# EAGLE board board_inga_50mil (EAGLE 7.2.0), part 1 of 2
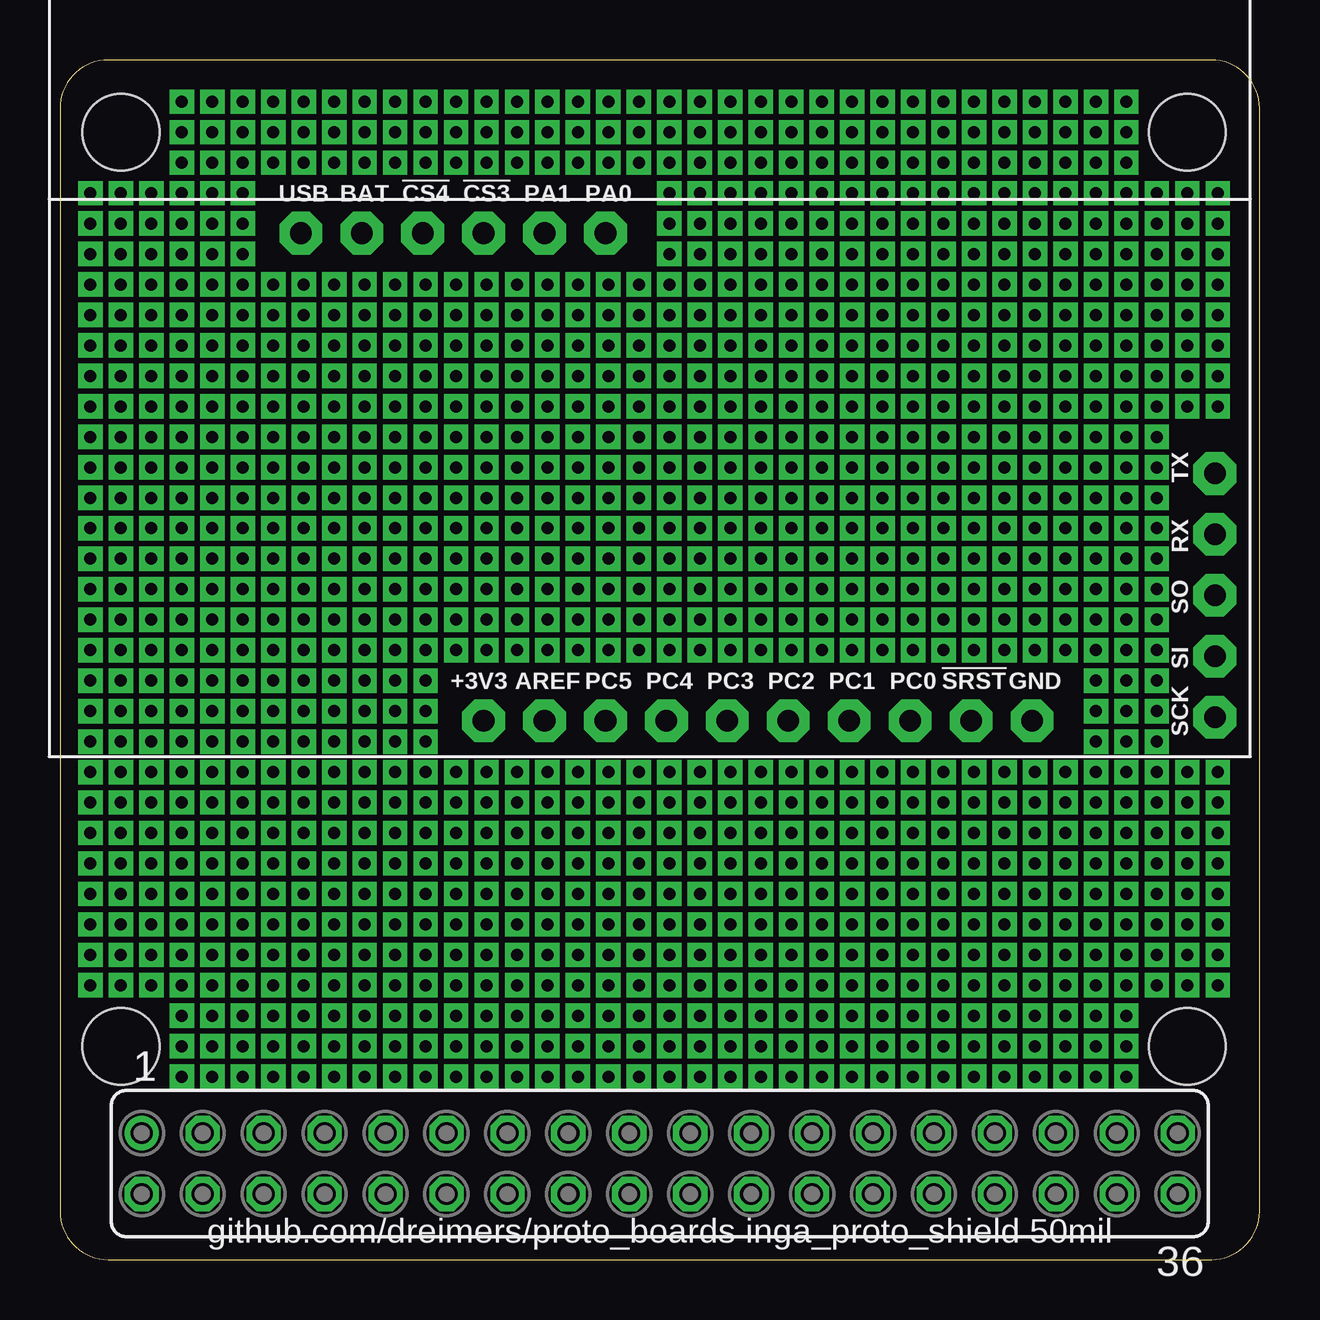
[diagram p0: board, top side]

Size 50 x 50 mm. Coordinates in mm from the lower left corner, seen from the top.
Outline: 0,48 0,2 arc90 2,0 48,0 arc90 50,2 50,48 arc90 48,50 2,50 arc90 0,48
Copper layers (1*16): Top 0.035mm / dielectric 1.5mm / Bottom 0.035mm
Design rules "ITEADstudio_DRC": minimum track width 6mil, minimum drill 12mil, track to track 6mil, track to pad 6mil, pad to pad 6mil, via to via 6mil, smd to smd 0mil, copper to edge 10mil, drill to drill 10mil, minimum pad ring 10mil, minimum via ring 6mil, stop-mask expansion 2mil, vias tented up to drill 100mil, thermal gap 10mil
Holes 3.2 mm at 2.54,8.89 46.99,8.89 2.54,46.99 46.99,46.99

## Footprints (pad centres in the part's own frame; a part is rotated, then mirrored left to right if it is on the bottom)
FE18-2 = drill 0.914: 1 -21.59,1.27 | drill 0.914 octagon: 2 -21.59,-1.27; 3 -19.05,1.27; 4 -19.05,-1.27; 5 -16.51,1.27; 6 -16.51,-1.27; 7 -13.97,1.27; 8 -13.97,-1.27; 9 -11.43,1.27; 10 -11.43,-1.27; 11 -8.89,1.27; 12 -8.89,-1.27; 13 -6.35,1.27; 14 -6.35,-1.27; 15 -3.81,1.27; 16 -3.81,-1.27; 17 -1.27,1.27; 18 -1.27,-1.27; 19 1.27,1.27; 20 1.27,-1.27; 21 3.81,1.27; 22 3.81,-1.27; 23 6.35,1.27; 24 6.35,-1.27; 25 8.89,1.27; 26 8.89,-1.27; 27 11.43,1.27; 28 11.43,-1.27; 29 13.97,1.27; 30 13.97,-1.27; 31 16.51,1.27; 32 16.51,-1.27; 33 19.05,1.27; 34 19.05,-1.27; 35 21.59,1.27; 36 21.59,-1.27
INGA1.6_NODRILLS = drill 0.9 pad 1.778 octagon: JP1_1 10.523,21.79; JP1_2 13.063,21.79; JP1_3 15.603,21.79; JP1_4 18.143,21.79; JP1_5 20.683,21.79; JP1_6 23.223,21.79; JP2_1 48.623,1.61; JP2_2 48.623,4.15; JP2_3 48.623,6.69; JP2_4 48.623,9.23; JP2_5 48.623,11.77; JP3_1 18.143,1.47; JP3_2 20.683,1.47; JP3_3 23.223,1.47; JP3_4 25.763,1.47; JP3_5 28.303,1.47; JP3_6 30.843,1.47; JP3_7 33.383,1.47; JP3_8 35.923,1.47; JP3_9 38.463,1.47; JP3_10 41.003,1.47

## Placement (x,y rotation side)
E$1  [FE18-2]  25,4 0 top
E$2  [INGA1.6_NODRILLS]  -0.48,20.99 0 top

## Library data of the parts
E$1 = con-lsta
E$2 = INGA 1.6

## Tracks (layer width: path | path; a pad name or v marks a point on that pad's centre or on a via)
S$1  (via drill 0.5 pad 1.02)
  other vias: 2.54,12.7
S$2  (via drill 0.5 pad 1.02)
  other vias: 3.81,12.7
S$3  (via drill 0.5 pad 1.02)
  other vias: 5.08,12.7
S$4  (via drill 0.5 pad 1.02)
  other vias: 6.35,12.7
S$5  (via drill 0.5 pad 1.02)
  other vias: 7.62,12.7
S$6  (via drill 0.5 pad 1.02)
  other vias: 8.89,12.7
S$7  (via drill 0.5 pad 1.02)
  other vias: 10.16,12.7
S$8  (via drill 0.5 pad 1.02)
  other vias: 11.43,12.7
S$9  (via drill 0.5 pad 1.02)
  other vias: 12.7,12.7
S$10  (via drill 0.5 pad 1.02)
  other vias: 13.97,12.7
S$11  (via drill 0.5 pad 1.02)
  other vias: 15.24,12.7
S$12  (via drill 0.5 pad 1.02)
  other vias: 16.51,12.7
S$13  (via drill 0.5 pad 1.02)
  other vias: 17.78,12.7
S$14  (via drill 0.5 pad 1.02)
  other vias: 19.05,12.7
S$15  (via drill 0.5 pad 1.02)
  other vias: 20.32,12.7
S$16  (via drill 0.5 pad 1.02)
  other vias: 21.59,12.7
S$17  (via drill 0.5 pad 1.02)
  other vias: 22.86,12.7
S$18  (via drill 0.5 pad 1.02)
  other vias: 24.13,12.7
S$19  (via drill 0.5 pad 1.02)
  other vias: 25.4,12.7
S$20  (via drill 0.5 pad 1.02)
  other vias: 26.67,12.7
S$21  (via drill 0.5 pad 1.02)
  other vias: 27.94,12.7
S$22  (via drill 0.5 pad 1.02)
  other vias: 29.21,12.7
S$23  (via drill 0.5 pad 1.02)
  other vias: 30.48,12.7
S$24  (via drill 0.5 pad 1.02)
  other vias: 31.75,12.7
S$25  (via drill 0.5 pad 1.02)
  other vias: 33.02,12.7
S$26  (via drill 0.5 pad 1.02)
  other vias: 34.29,12.7
S$27  (via drill 0.5 pad 1.02)
  other vias: 35.56,12.7
S$28  (via drill 0.5 pad 1.02)
  other vias: 36.83,12.7
S$29  (via drill 0.5 pad 1.02)
  other vias: 38.1,12.7
S$30  (via drill 0.5 pad 1.02)
  other vias: 39.37,12.7
S$31  (via drill 0.5 pad 1.02)
  other vias: 40.64,12.7
S$32  (via drill 0.5 pad 1.02)
  other vias: 41.91,12.7
S$33  (via drill 0.5 pad 1.02)
  other vias: 43.18,12.7
S$34  (via drill 0.5 pad 1.02)
  other vias: 44.45,12.7
S$35  (via drill 0.5 pad 1.02)
  other vias: 45.72,12.7
S$36  (via drill 0.5 pad 1.02)
  other vias: 46.99,12.7
S$37  (via drill 0.5 pad 1.02)
  other vias: 48.26,12.7
S$38  (via drill 0.5 pad 1.02)
  other vias: 1.27,12.7
S$39  (via drill 0.5 pad 1.02)
  other vias: 2.54,11.43
S$40  (via drill 0.5 pad 1.02)
  other vias: 3.81,11.43
S$41  (via drill 0.5 pad 1.02)
  other vias: 5.08,11.43
S$42  (via drill 0.5 pad 1.02)
  other vias: 6.35,11.43
S$43  (via drill 0.5 pad 1.02)
  other vias: 7.62,11.43
S$44  (via drill 0.5 pad 1.02)
  other vias: 8.89,11.43
S$45  (via drill 0.5 pad 1.02)
  other vias: 10.16,11.43
S$46  (via drill 0.5 pad 1.02)
  other vias: 11.43,11.43
S$47  (via drill 0.5 pad 1.02)
  other vias: 12.7,11.43
S$48  (via drill 0.5 pad 1.02)
  other vias: 13.97,11.43
S$49  (via drill 0.5 pad 1.02)
  other vias: 15.24,11.43
S$50  (via drill 0.5 pad 1.02)
  other vias: 16.51,11.43
S$51  (via drill 0.5 pad 1.02)
  other vias: 17.78,11.43
S$52  (via drill 0.5 pad 1.02)
  other vias: 19.05,11.43
S$53  (via drill 0.5 pad 1.02)
  other vias: 20.32,11.43
S$54  (via drill 0.5 pad 1.02)
  other vias: 21.59,11.43
S$55  (via drill 0.5 pad 1.02)
  other vias: 22.86,11.43
S$56  (via drill 0.5 pad 1.02)
  other vias: 24.13,11.43
S$57  (via drill 0.5 pad 1.02)
  other vias: 25.4,11.43
S$58  (via drill 0.5 pad 1.02)
  other vias: 26.67,11.43
S$59  (via drill 0.5 pad 1.02)
  other vias: 27.94,11.43
S$60  (via drill 0.5 pad 1.02)
  other vias: 29.21,11.43
S$61  (via drill 0.5 pad 1.02)
  other vias: 30.48,11.43
S$62  (via drill 0.5 pad 1.02)
  other vias: 31.75,11.43
S$63  (via drill 0.5 pad 1.02)
  other vias: 33.02,11.43
S$64  (via drill 0.5 pad 1.02)
  other vias: 34.29,11.43
S$65  (via drill 0.5 pad 1.02)
  other vias: 35.56,11.43
S$66  (via drill 0.5 pad 1.02)
  other vias: 36.83,11.43
S$67  (via drill 0.5 pad 1.02)
  other vias: 38.1,11.43
S$68  (via drill 0.5 pad 1.02)
  other vias: 39.37,11.43
S$69  (via drill 0.5 pad 1.02)
  other vias: 40.64,11.43
S$70  (via drill 0.5 pad 1.02)
  other vias: 41.91,11.43
S$71  (via drill 0.5 pad 1.02)
  other vias: 43.18,11.43
S$72  (via drill 0.5 pad 1.02)
  other vias: 44.45,11.43
S$73  (via drill 0.5 pad 1.02)
  other vias: 45.72,11.43
S$74  (via drill 0.5 pad 1.02)
  other vias: 46.99,11.43
S$75  (via drill 0.5 pad 1.02)
  other vias: 48.26,11.43
S$76  (via drill 0.5 pad 1.02)
  other vias: 1.27,11.43
S$77  (via drill 0.5 pad 1.02)
  other vias: 2.54,15.24
S$78  (via drill 0.5 pad 1.02)
  other vias: 3.81,15.24
S$79  (via drill 0.5 pad 1.02)
  other vias: 5.08,15.24
S$80  (via drill 0.5 pad 1.02)
  other vias: 6.35,15.24
S$81  (via drill 0.5 pad 1.02)
  other vias: 7.62,15.24
S$82  (via drill 0.5 pad 1.02)
  other vias: 8.89,15.24
S$83  (via drill 0.5 pad 1.02)
  other vias: 10.16,15.24
S$84  (via drill 0.5 pad 1.02)
  other vias: 11.43,15.24
S$85  (via drill 0.5 pad 1.02)
  other vias: 12.7,15.24
S$86  (via drill 0.5 pad 1.02)
  other vias: 13.97,15.24
S$87  (via drill 0.5 pad 1.02)
  other vias: 15.24,15.24
S$88  (via drill 0.5 pad 1.02)
  other vias: 16.51,15.24
S$89  (via drill 0.5 pad 1.02)
  other vias: 17.78,15.24
S$90  (via drill 0.5 pad 1.02)
  other vias: 19.05,15.24
S$91  (via drill 0.5 pad 1.02)
  other vias: 20.32,15.24
S$92  (via drill 0.5 pad 1.02)
  other vias: 21.59,15.24
S$93  (via drill 0.5 pad 1.02)
  other vias: 22.86,15.24
S$94  (via drill 0.5 pad 1.02)
  other vias: 24.13,15.24
S$95  (via drill 0.5 pad 1.02)
  other vias: 25.4,15.24
S$96  (via drill 0.5 pad 1.02)
  other vias: 26.67,15.24
S$97  (via drill 0.5 pad 1.02)
  other vias: 27.94,15.24
S$98  (via drill 0.5 pad 1.02)
  other vias: 29.21,15.24
S$99  (via drill 0.5 pad 1.02)
  other vias: 30.48,15.24
S$100  (via drill 0.5 pad 1.02)
  other vias: 31.75,15.24
S$101  (via drill 0.5 pad 1.02)
  other vias: 33.02,15.24
S$102  (via drill 0.5 pad 1.02)
  other vias: 34.29,15.24
S$103  (via drill 0.5 pad 1.02)
  other vias: 35.56,15.24
S$104  (via drill 0.5 pad 1.02)
  other vias: 36.83,15.24
S$105  (via drill 0.5 pad 1.02)
  other vias: 38.1,15.24
S$106  (via drill 0.5 pad 1.02)
  other vias: 39.37,15.24
S$107  (via drill 0.5 pad 1.02)
  other vias: 40.64,15.24
S$108  (via drill 0.5 pad 1.02)
  other vias: 41.91,15.24
S$109  (via drill 0.5 pad 1.02)
  other vias: 43.18,15.24
S$110  (via drill 0.5 pad 1.02)
  other vias: 44.45,15.24
S$111  (via drill 0.5 pad 1.02)
  other vias: 45.72,15.24
S$112  (via drill 0.5 pad 1.02)
  other vias: 46.99,15.24
S$113  (via drill 0.5 pad 1.02)
  other vias: 48.26,15.24
S$114  (via drill 0.5 pad 1.02)
  other vias: 1.27,15.24
S$115  (via drill 0.5 pad 1.02)
  other vias: 2.54,13.97
S$116  (via drill 0.5 pad 1.02)
  other vias: 3.81,13.97
S$117  (via drill 0.5 pad 1.02)
  other vias: 5.08,13.97
S$118  (via drill 0.5 pad 1.02)
  other vias: 6.35,13.97
S$119  (via drill 0.5 pad 1.02)
  other vias: 7.62,13.97
S$120  (via drill 0.5 pad 1.02)
  other vias: 8.89,13.97
S$121  (via drill 0.5 pad 1.02)
  other vias: 10.16,13.97
S$122  (via drill 0.5 pad 1.02)
  other vias: 11.43,13.97
S$123  (via drill 0.5 pad 1.02)
  other vias: 12.7,13.97
S$124  (via drill 0.5 pad 1.02)
  other vias: 13.97,13.97
S$125  (via drill 0.5 pad 1.02)
  other vias: 15.24,13.97
S$126  (via drill 0.5 pad 1.02)
  other vias: 16.51,13.97
S$127  (via drill 0.5 pad 1.02)
  other vias: 17.78,13.97
S$128  (via drill 0.5 pad 1.02)
  other vias: 19.05,13.97
S$129  (via drill 0.5 pad 1.02)
  other vias: 20.32,13.97
S$130  (via drill 0.5 pad 1.02)
  other vias: 21.59,13.97
S$131  (via drill 0.5 pad 1.02)
  other vias: 22.86,13.97
S$132  (via drill 0.5 pad 1.02)
  other vias: 24.13,13.97
S$133  (via drill 0.5 pad 1.02)
  other vias: 25.4,13.97
S$134  (via drill 0.5 pad 1.02)
  other vias: 26.67,13.97
S$135  (via drill 0.5 pad 1.02)
  other vias: 27.94,13.97
S$136  (via drill 0.5 pad 1.02)
  other vias: 29.21,13.97
S$137  (via drill 0.5 pad 1.02)
  other vias: 30.48,13.97
S$138  (via drill 0.5 pad 1.02)
  other vias: 31.75,13.97
S$139  (via drill 0.5 pad 1.02)
  other vias: 33.02,13.97
S$140  (via drill 0.5 pad 1.02)
  other vias: 34.29,13.97
S$141  (via drill 0.5 pad 1.02)
  other vias: 35.56,13.97
S$142  (via drill 0.5 pad 1.02)
  other vias: 36.83,13.97
S$143  (via drill 0.5 pad 1.02)
  other vias: 38.1,13.97
S$144  (via drill 0.5 pad 1.02)
  other vias: 39.37,13.97
S$145  (via drill 0.5 pad 1.02)
  other vias: 40.64,13.97
S$146  (via drill 0.5 pad 1.02)
  other vias: 41.91,13.97
S$147  (via drill 0.5 pad 1.02)
  other vias: 43.18,13.97
S$148  (via drill 0.5 pad 1.02)
  other vias: 44.45,13.97
S$149  (via drill 0.5 pad 1.02)
  other vias: 45.72,13.97
S$150  (via drill 0.5 pad 1.02)
  other vias: 46.99,13.97
S$151  (via drill 0.5 pad 1.02)
  other vias: 48.26,13.97
S$152  (via drill 0.5 pad 1.02)
  other vias: 1.27,13.97
S$153  (via drill 0.5 pad 1.02)
  other vias: 2.54,17.78
S$154  (via drill 0.5 pad 1.02)
  other vias: 3.81,17.78
S$155  (via drill 0.5 pad 1.02)
  other vias: 5.08,17.78
S$156  (via drill 0.5 pad 1.02)
  other vias: 6.35,17.78
S$157  (via drill 0.5 pad 1.02)
  other vias: 7.62,17.78
S$158  (via drill 0.5 pad 1.02)
  other vias: 8.89,17.78
S$159  (via drill 0.5 pad 1.02)
  other vias: 10.16,17.78
S$160  (via drill 0.5 pad 1.02)
  other vias: 11.43,17.78
S$161  (via drill 0.5 pad 1.02)
  other vias: 12.7,17.78
S$162  (via drill 0.5 pad 1.02)
  other vias: 13.97,17.78
S$163  (via drill 0.5 pad 1.02)
  other vias: 15.24,17.78
S$164  (via drill 0.5 pad 1.02)
  other vias: 16.51,17.78
S$165  (via drill 0.5 pad 1.02)
  other vias: 17.78,17.78
S$166  (via drill 0.5 pad 1.02)
  other vias: 19.05,17.78
S$167  (via drill 0.5 pad 1.02)
  other vias: 20.32,17.78
S$168  (via drill 0.5 pad 1.02)
  other vias: 21.59,17.78
S$169  (via drill 0.5 pad 1.02)
  other vias: 22.86,17.78
S$170  (via drill 0.5 pad 1.02)
  other vias: 24.13,17.78
S$171  (via drill 0.5 pad 1.02)
  other vias: 25.4,17.78
S$172  (via drill 0.5 pad 1.02)
  other vias: 26.67,17.78
S$173  (via drill 0.5 pad 1.02)
  other vias: 27.94,17.78
S$174  (via drill 0.5 pad 1.02)
  other vias: 29.21,17.78
S$175  (via drill 0.5 pad 1.02)
  other vias: 30.48,17.78
S$176  (via drill 0.5 pad 1.02)
  other vias: 31.75,17.78
S$177  (via drill 0.5 pad 1.02)
  other vias: 33.02,17.78
S$178  (via drill 0.5 pad 1.02)
  other vias: 34.29,17.78
S$179  (via drill 0.5 pad 1.02)
  other vias: 35.56,17.78
S$180  (via drill 0.5 pad 1.02)
  other vias: 36.83,17.78
S$181  (via drill 0.5 pad 1.02)
  other vias: 38.1,17.78
S$182  (via drill 0.5 pad 1.02)
  other vias: 39.37,17.78
S$183  (via drill 0.5 pad 1.02)
  other vias: 40.64,17.78
S$184  (via drill 0.5 pad 1.02)
  other vias: 41.91,17.78
S$185  (via drill 0.5 pad 1.02)
  other vias: 43.18,17.78
S$186  (via drill 0.5 pad 1.02)
  other vias: 44.45,17.78
S$187  (via drill 0.5 pad 1.02)
  other vias: 45.72,17.78
S$188  (via drill 0.5 pad 1.02)
  other vias: 46.99,17.78
S$189  (via drill 0.5 pad 1.02)
  other vias: 48.26,17.78
S$190  (via drill 0.5 pad 1.02)
  other vias: 1.27,17.78
S$191  (via drill 0.5 pad 1.02)
  other vias: 2.54,16.51
S$192  (via drill 0.5 pad 1.02)
  other vias: 3.81,16.51
S$193  (via drill 0.5 pad 1.02)
  other vias: 5.08,16.51
S$194  (via drill 0.5 pad 1.02)
  other vias: 6.35,16.51
S$195  (via drill 0.5 pad 1.02)
  other vias: 7.62,16.51
S$196  (via drill 0.5 pad 1.02)
  other vias: 8.89,16.51
S$197  (via drill 0.5 pad 1.02)
  other vias: 10.16,16.51
S$198  (via drill 0.5 pad 1.02)
  other vias: 11.43,16.51
S$199  (via drill 0.5 pad 1.02)
  other vias: 12.7,16.51
S$200  (via drill 0.5 pad 1.02)
  other vias: 13.97,16.51
S$201  (via drill 0.5 pad 1.02)
  other vias: 15.24,16.51
S$202  (via drill 0.5 pad 1.02)
  other vias: 16.51,16.51
S$203  (via drill 0.5 pad 1.02)
  other vias: 17.78,16.51
S$204  (via drill 0.5 pad 1.02)
  other vias: 19.05,16.51
S$205  (via drill 0.5 pad 1.02)
  other vias: 20.32,16.51
S$206  (via drill 0.5 pad 1.02)
  other vias: 21.59,16.51
S$207  (via drill 0.5 pad 1.02)
  other vias: 22.86,16.51
S$208  (via drill 0.5 pad 1.02)
  other vias: 24.13,16.51
S$209  (via drill 0.5 pad 1.02)
  other vias: 25.4,16.51
S$210  (via drill 0.5 pad 1.02)
  other vias: 26.67,16.51
S$211  (via drill 0.5 pad 1.02)
  other vias: 27.94,16.51
S$212  (via drill 0.5 pad 1.02)
  other vias: 29.21,16.51
S$213  (via drill 0.5 pad 1.02)
  other vias: 30.48,16.51
S$214  (via drill 0.5 pad 1.02)
  other vias: 31.75,16.51
S$215  (via drill 0.5 pad 1.02)
  other vias: 33.02,16.51
S$216  (via drill 0.5 pad 1.02)
  other vias: 34.29,16.51
S$217  (via drill 0.5 pad 1.02)
  other vias: 35.56,16.51
S$218  (via drill 0.5 pad 1.02)
  other vias: 36.83,16.51
S$219  (via drill 0.5 pad 1.02)
  other vias: 38.1,16.51
S$220  (via drill 0.5 pad 1.02)
  other vias: 39.37,16.51
S$221  (via drill 0.5 pad 1.02)
  other vias: 40.64,16.51
S$222  (via drill 0.5 pad 1.02)
  other vias: 41.91,16.51
S$223  (via drill 0.5 pad 1.02)
  other vias: 43.18,16.51
S$224  (via drill 0.5 pad 1.02)
  other vias: 44.45,16.51
S$225  (via drill 0.5 pad 1.02)
  other vias: 45.72,16.51
S$226  (via drill 0.5 pad 1.02)
  other vias: 46.99,16.51
S$227  (via drill 0.5 pad 1.02)
  other vias: 48.26,16.51
S$228  (via drill 0.5 pad 1.02)
  other vias: 1.27,16.51
S$229  (via drill 0.5 pad 1.02)
  other vias: 2.54,20.32
S$230  (via drill 0.5 pad 1.02)
  other vias: 3.81,20.32
S$231  (via drill 0.5 pad 1.02)
  other vias: 5.08,20.32
S$232  (via drill 0.5 pad 1.02)
  other vias: 6.35,20.32
S$233  (via drill 0.5 pad 1.02)
  other vias: 7.62,20.32
S$234  (via drill 0.5 pad 1.02)
  other vias: 8.89,20.32
S$235  (via drill 0.5 pad 1.02)
  other vias: 10.16,20.32
S$236  (via drill 0.5 pad 1.02)
  other vias: 11.43,20.32
S$237  (via drill 0.5 pad 1.02)
  other vias: 12.7,20.32
S$238  (via drill 0.5 pad 1.02)
  other vias: 13.97,20.32
S$239  (via drill 0.5 pad 1.02)
  other vias: 15.24,20.32
S$240  (via drill 0.5 pad 1.02)
  other vias: 16.51,20.32
S$241  (via drill 0.5 pad 1.02)
  other vias: 17.78,20.32
S$242  (via drill 0.5 pad 1.02)
  other vias: 19.05,20.32
S$243  (via drill 0.5 pad 1.02)
  other vias: 20.32,20.32
S$244  (via drill 0.5 pad 1.02)
  other vias: 21.59,20.32
S$245  (via drill 0.5 pad 1.02)
  other vias: 22.86,20.32
S$246  (via drill 0.5 pad 1.02)
  other vias: 24.13,20.32
S$247  (via drill 0.5 pad 1.02)
  other vias: 25.4,20.32
S$248  (via drill 0.5 pad 1.02)
  other vias: 26.67,20.32
S$249  (via drill 0.5 pad 1.02)
  other vias: 27.94,20.32
S$250  (via drill 0.5 pad 1.02)
  other vias: 29.21,20.32
S$251  (via drill 0.5 pad 1.02)
  other vias: 30.48,20.32
S$252  (via drill 0.5 pad 1.02)
  other vias: 31.75,20.32
S$253  (via drill 0.5 pad 1.02)
  other vias: 33.02,20.32
S$254  (via drill 0.5 pad 1.02)
  other vias: 34.29,20.32
S$255  (via drill 0.5 pad 1.02)
  other vias: 35.56,20.32
S$256  (via drill 0.5 pad 1.02)
  other vias: 36.83,20.32
S$257  (via drill 0.5 pad 1.02)
  other vias: 38.1,20.32
S$258  (via drill 0.5 pad 1.02)
  other vias: 39.37,20.32
S$259  (via drill 0.5 pad 1.02)
  other vias: 40.64,20.32
S$260  (via drill 0.5 pad 1.02)
  other vias: 41.91,20.32
S$261  (via drill 0.5 pad 1.02)
  other vias: 43.18,20.32
S$262  (via drill 0.5 pad 1.02)
  other vias: 44.45,20.32
S$263  (via drill 0.5 pad 1.02)
  other vias: 45.72,20.32
S$264  (via drill 0.5 pad 1.02)
  other vias: 46.99,20.32
S$265  (via drill 0.5 pad 1.02)
  other vias: 48.26,20.32
S$266  (via drill 0.5 pad 1.02)
  other vias: 1.27,20.32
S$267  (via drill 0.5 pad 1.02)
  other vias: 2.54,19.05
S$268  (via drill 0.5 pad 1.02)
  other vias: 3.81,19.05
S$269  (via drill 0.5 pad 1.02)
  other vias: 5.08,19.05
S$270  (via drill 0.5 pad 1.02)
  other vias: 6.35,19.05
S$271  (via drill 0.5 pad 1.02)
  other vias: 7.62,19.05
S$272  (via drill 0.5 pad 1.02)
  other vias: 8.89,19.05
S$273  (via drill 0.5 pad 1.02)
  other vias: 10.16,19.05
S$274  (via drill 0.5 pad 1.02)
  other vias: 11.43,19.05
S$275  (via drill 0.5 pad 1.02)
  other vias: 12.7,19.05
S$276  (via drill 0.5 pad 1.02)
  other vias: 13.97,19.05
S$277  (via drill 0.5 pad 1.02)
  other vias: 15.24,19.05
S$278  (via drill 0.5 pad 1.02)
  other vias: 16.51,19.05
S$279  (via drill 0.5 pad 1.02)
  other vias: 17.78,19.05
S$280  (via drill 0.5 pad 1.02)
  other vias: 19.05,19.05
S$281  (via drill 0.5 pad 1.02)
  other vias: 20.32,19.05
S$282  (via drill 0.5 pad 1.02)
  other vias: 21.59,19.05
S$283  (via drill 0.5 pad 1.02)
  other vias: 22.86,19.05
S$284  (via drill 0.5 pad 1.02)
  other vias: 24.13,19.05
S$285  (via drill 0.5 pad 1.02)
  other vias: 25.4,19.05
S$286  (via drill 0.5 pad 1.02)
  other vias: 26.67,19.05
S$287  (via drill 0.5 pad 1.02)
  other vias: 27.94,19.05
S$288  (via drill 0.5 pad 1.02)
  other vias: 29.21,19.05
S$289  (via drill 0.5 pad 1.02)
  other vias: 30.48,19.05
S$290  (via drill 0.5 pad 1.02)
  other vias: 31.75,19.05
S$291  (via drill 0.5 pad 1.02)
  other vias: 33.02,19.05
S$292  (via drill 0.5 pad 1.02)
  other vias: 34.29,19.05
S$293  (via drill 0.5 pad 1.02)
  other vias: 35.56,19.05
S$294  (via drill 0.5 pad 1.02)
  other vias: 36.83,19.05
S$295  (via drill 0.5 pad 1.02)
  other vias: 38.1,19.05
S$296  (via drill 0.5 pad 1.02)
  other vias: 39.37,19.05
S$297  (via drill 0.5 pad 1.02)
  other vias: 40.64,19.05
S$298  (via drill 0.5 pad 1.02)
  other vias: 41.91,19.05
S$299  (via drill 0.5 pad 1.02)
  other vias: 43.18,19.05
S$300  (via drill 0.5 pad 1.02)
  other vias: 44.45,19.05
S$301  (via drill 0.5 pad 1.02)
  other vias: 45.72,19.05
S$302  (via drill 0.5 pad 1.02)
  other vias: 46.99,19.05
S$303  (via drill 0.5 pad 1.02)
  other vias: 48.26,19.05
S$304  (via drill 0.5 pad 1.02)
  other vias: 1.27,19.05
S$305  (via drill 0.5 pad 1.02)
  other vias: 2.54,22.86
S$306  (via drill 0.5 pad 1.02)
  other vias: 3.81,22.86
S$307  (via drill 0.5 pad 1.02)
  other vias: 5.08,22.86
S$308  (via drill 0.5 pad 1.02)
  other vias: 6.35,22.86
S$309  (via drill 0.5 pad 1.02)
  other vias: 7.62,22.86
S$310  (via drill 0.5 pad 1.02)
  other vias: 8.89,22.86
S$311  (via drill 0.5 pad 1.02)
  other vias: 10.16,22.86
S$312  (via drill 0.5 pad 1.02)
  other vias: 11.43,22.86
S$313  (via drill 0.5 pad 1.02)
  other vias: 12.7,22.86
S$314  (via drill 0.5 pad 1.02)
  other vias: 13.97,22.86
S$315  (via drill 0.5 pad 1.02)
  other vias: 15.24,22.86
S$337  (via drill 0.5 pad 1.02)
  other vias: 43.18,22.86
S$338  (via drill 0.5 pad 1.02)
  other vias: 44.45,22.86
S$339  (via drill 0.5 pad 1.02)
  other vias: 45.72,22.86
S$342  (via drill 0.5 pad 1.02)
  other vias: 1.27,22.86
S$343  (via drill 0.5 pad 1.02)
  other vias: 2.54,21.59
S$344  (via drill 0.5 pad 1.02)
  other vias: 3.81,21.59
S$345  (via drill 0.5 pad 1.02)
  other vias: 5.08,21.59
S$346  (via drill 0.5 pad 1.02)
  other vias: 6.35,21.59
S$347  (via drill 0.5 pad 1.02)
  other vias: 7.62,21.59
S$348  (via drill 0.5 pad 1.02)
  other vias: 8.89,21.59
S$349  (via drill 0.5 pad 1.02)
  other vias: 10.16,21.59
S$350  (via drill 0.5 pad 1.02)
  other vias: 11.43,21.59
S$351  (via drill 0.5 pad 1.02)
  other vias: 12.7,21.59
S$352  (via drill 0.5 pad 1.02)
  other vias: 13.97,21.59
S$353  (via drill 0.5 pad 1.02)
  other vias: 15.24,21.59
S$375  (via drill 0.5 pad 1.02)
  other vias: 43.18,21.59
S$376  (via drill 0.5 pad 1.02)
  other vias: 44.45,21.59
S$377  (via drill 0.5 pad 1.02)
  other vias: 45.72,21.59
S$380  (via drill 0.5 pad 1.02)
  other vias: 1.27,21.59
S$381  (via drill 0.5 pad 1.02)
  other vias: 2.54,25.4
S$382  (via drill 0.5 pad 1.02)
  other vias: 3.81,25.4
S$383  (via drill 0.5 pad 1.02)
  other vias: 5.08,25.4
S$384  (via drill 0.5 pad 1.02)
  other vias: 6.35,25.4
S$385  (via drill 0.5 pad 1.02)
  other vias: 7.62,25.4
S$386  (via drill 0.5 pad 1.02)
  other vias: 8.89,25.4
S$387  (via drill 0.5 pad 1.02)
  other vias: 10.16,25.4
S$388  (via drill 0.5 pad 1.02)
  other vias: 11.43,25.4
S$389  (via drill 0.5 pad 1.02)
  other vias: 12.7,25.4
S$390  (via drill 0.5 pad 1.02)
  other vias: 13.97,25.4
S$391  (via drill 0.5 pad 1.02)
  other vias: 15.24,25.4
S$392  (via drill 0.5 pad 1.02)
  other vias: 16.51,25.4
S$393  (via drill 0.5 pad 1.02)
  other vias: 17.78,25.4
S$394  (via drill 0.5 pad 1.02)
  other vias: 19.05,25.4
S$395  (via drill 0.5 pad 1.02)
  other vias: 20.32,25.4
S$396  (via drill 0.5 pad 1.02)
  other vias: 21.59,25.4
S$397  (via drill 0.5 pad 1.02)
  other vias: 22.86,25.4
S$398  (via drill 0.5 pad 1.02)
  other vias: 24.13,25.4
S$399  (via drill 0.5 pad 1.02)
  other vias: 25.4,25.4
S$400  (via drill 0.5 pad 1.02)
  other vias: 26.67,25.4
S$401  (via drill 0.5 pad 1.02)
  other vias: 27.94,25.4
S$402  (via drill 0.5 pad 1.02)
  other vias: 29.21,25.4
S$403  (via drill 0.5 pad 1.02)
  other vias: 30.48,25.4
S$404  (via drill 0.5 pad 1.02)
  other vias: 31.75,25.4
S$405  (via drill 0.5 pad 1.02)
  other vias: 33.02,25.4
S$406  (via drill 0.5 pad 1.02)
  other vias: 34.29,25.4
S$407  (via drill 0.5 pad 1.02)
  other vias: 35.56,25.4
S$408  (via drill 0.5 pad 1.02)
  other vias: 36.83,25.4
S$409  (via drill 0.5 pad 1.02)
  other vias: 38.1,25.4
S$410  (via drill 0.5 pad 1.02)
  other vias: 39.37,25.4
S$411  (via drill 0.5 pad 1.02)
  other vias: 40.64,25.4
S$412  (via drill 0.5 pad 1.02)
  other vias: 41.91,25.4
S$413  (via drill 0.5 pad 1.02)
  other vias: 43.18,25.4
S$414  (via drill 0.5 pad 1.02)
  other vias: 44.45,25.4
S$415  (via drill 0.5 pad 1.02)
  other vias: 45.72,25.4
S$418  (via drill 0.5 pad 1.02)
  other vias: 1.27,25.4
S$419  (via drill 0.5 pad 1.02)
  other vias: 2.54,24.13
S$420  (via drill 0.5 pad 1.02)
  other vias: 3.81,24.13
S$421  (via drill 0.5 pad 1.02)
  other vias: 5.08,24.13
S$422  (via drill 0.5 pad 1.02)
  other vias: 6.35,24.13
S$423  (via drill 0.5 pad 1.02)
  other vias: 7.62,24.13
S$424  (via drill 0.5 pad 1.02)
  other vias: 8.89,24.13
S$425  (via drill 0.5 pad 1.02)
  other vias: 10.16,24.13
S$426  (via drill 0.5 pad 1.02)
  other vias: 11.43,24.13
S$427  (via drill 0.5 pad 1.02)
  other vias: 12.7,24.13
S$428  (via drill 0.5 pad 1.02)
  other vias: 13.97,24.13
S$429  (via drill 0.5 pad 1.02)
  other vias: 15.24,24.13
S$451  (via drill 0.5 pad 1.02)
  other vias: 43.18,24.13
S$452  (via drill 0.5 pad 1.02)
  other vias: 44.45,24.13
S$453  (via drill 0.5 pad 1.02)
  other vias: 45.72,24.13
S$456  (via drill 0.5 pad 1.02)
  other vias: 1.27,24.13
S$457  (via drill 0.5 pad 1.02)
  other vias: 2.54,27.94
S$458  (via drill 0.5 pad 1.02)
  other vias: 3.81,27.94
S$459  (via drill 0.5 pad 1.02)
  other vias: 5.08,27.94
S$460  (via drill 0.5 pad 1.02)
  other vias: 6.35,27.94
S$461  (via drill 0.5 pad 1.02)
  other vias: 7.62,27.94
S$462  (via drill 0.5 pad 1.02)
  other vias: 8.89,27.94
S$463  (via drill 0.5 pad 1.02)
  other vias: 10.16,27.94
S$464  (via drill 0.5 pad 1.02)
  other vias: 11.43,27.94
S$465  (via drill 0.5 pad 1.02)
  other vias: 12.7,27.94
S$466  (via drill 0.5 pad 1.02)
  other vias: 13.97,27.94
S$467  (via drill 0.5 pad 1.02)
  other vias: 15.24,27.94
S$468  (via drill 0.5 pad 1.02)
  other vias: 16.51,27.94
S$469  (via drill 0.5 pad 1.02)
  other vias: 17.78,27.94
S$470  (via drill 0.5 pad 1.02)
  other vias: 19.05,27.94
S$471  (via drill 0.5 pad 1.02)
  other vias: 20.32,27.94
S$472  (via drill 0.5 pad 1.02)
  other vias: 21.59,27.94
S$473  (via drill 0.5 pad 1.02)
  other vias: 22.86,27.94
S$474  (via drill 0.5 pad 1.02)
  other vias: 24.13,27.94
S$475  (via drill 0.5 pad 1.02)
  other vias: 25.4,27.94
S$476  (via drill 0.5 pad 1.02)
  other vias: 26.67,27.94
S$477  (via drill 0.5 pad 1.02)
  other vias: 27.94,27.94
S$478  (via drill 0.5 pad 1.02)
  other vias: 29.21,27.94
S$479  (via drill 0.5 pad 1.02)
  other vias: 30.48,27.94
S$480  (via drill 0.5 pad 1.02)
  other vias: 31.75,27.94
S$481  (via drill 0.5 pad 1.02)
  other vias: 33.02,27.94
S$482  (via drill 0.5 pad 1.02)
  other vias: 34.29,27.94
S$483  (via drill 0.5 pad 1.02)
  other vias: 35.56,27.94
S$484  (via drill 0.5 pad 1.02)
  other vias: 36.83,27.94
S$485  (via drill 0.5 pad 1.02)
  other vias: 38.1,27.94
S$486  (via drill 0.5 pad 1.02)
  other vias: 39.37,27.94
S$487  (via drill 0.5 pad 1.02)
  other vias: 40.64,27.94
S$488  (via drill 0.5 pad 1.02)
  other vias: 41.91,27.94
S$489  (via drill 0.5 pad 1.02)
  other vias: 43.18,27.94
S$490  (via drill 0.5 pad 1.02)
  other vias: 44.45,27.94
S$491  (via drill 0.5 pad 1.02)
  other vias: 45.72,27.94
S$494  (via drill 0.5 pad 1.02)
  other vias: 1.27,27.94
S$495  (via drill 0.5 pad 1.02)
  other vias: 2.54,26.67
S$496  (via drill 0.5 pad 1.02)
  other vias: 3.81,26.67
S$497  (via drill 0.5 pad 1.02)
  other vias: 5.08,26.67
S$498  (via drill 0.5 pad 1.02)
  other vias: 6.35,26.67
S$499  (via drill 0.5 pad 1.02)
  other vias: 7.62,26.67
S$500  (via drill 0.5 pad 1.02)
  other vias: 8.89,26.67
S$501  (via drill 0.5 pad 1.02)
  other vias: 10.16,26.67
S$502  (via drill 0.5 pad 1.02)
  other vias: 11.43,26.67
S$503  (via drill 0.5 pad 1.02)
  other vias: 12.7,26.67
S$504  (via drill 0.5 pad 1.02)
  other vias: 13.97,26.67
S$505  (via drill 0.5 pad 1.02)
  other vias: 15.24,26.67
S$506  (via drill 0.5 pad 1.02)
  other vias: 16.51,26.67
S$507  (via drill 0.5 pad 1.02)
  other vias: 17.78,26.67
S$508  (via drill 0.5 pad 1.02)
  other vias: 19.05,26.67
S$509  (via drill 0.5 pad 1.02)
  other vias: 20.32,26.67
S$510  (via drill 0.5 pad 1.02)
  other vias: 21.59,26.67
S$511  (via drill 0.5 pad 1.02)
  other vias: 22.86,26.67
S$512  (via drill 0.5 pad 1.02)
  other vias: 24.13,26.67
S$513  (via drill 0.5 pad 1.02)
  other vias: 25.4,26.67
S$514  (via drill 0.5 pad 1.02)
  other vias: 26.67,26.67
S$515  (via drill 0.5 pad 1.02)
  other vias: 27.94,26.67
S$516  (via drill 0.5 pad 1.02)
  other vias: 29.21,26.67
S$517  (via drill 0.5 pad 1.02)
  other vias: 30.48,26.67
S$518  (via drill 0.5 pad 1.02)
  other vias: 31.75,26.67
S$519  (via drill 0.5 pad 1.02)
  other vias: 33.02,26.67
S$520  (via drill 0.5 pad 1.02)
  other vias: 34.29,26.67
S$521  (via drill 0.5 pad 1.02)
  other vias: 35.56,26.67
S$522  (via drill 0.5 pad 1.02)
  other vias: 36.83,26.67
S$523  (via drill 0.5 pad 1.02)
  other vias: 38.1,26.67
S$524  (via drill 0.5 pad 1.02)
  other vias: 39.37,26.67
S$525  (via drill 0.5 pad 1.02)
  other vias: 40.64,26.67
S$526  (via drill 0.5 pad 1.02)
  other vias: 41.91,26.67
S$527  (via drill 0.5 pad 1.02)
  other vias: 43.18,26.67
S$528  (via drill 0.5 pad 1.02)
  other vias: 44.45,26.67
S$529  (via drill 0.5 pad 1.02)
  other vias: 45.72,26.67
S$532  (via drill 0.5 pad 1.02)
  other vias: 1.27,26.67
S$533  (via drill 0.5 pad 1.02)
  other vias: 2.54,30.48
S$534  (via drill 0.5 pad 1.02)
  other vias: 3.81,30.48
S$535  (via drill 0.5 pad 1.02)
  other vias: 5.08,30.48
S$536  (via drill 0.5 pad 1.02)
  other vias: 6.35,30.48
S$537  (via drill 0.5 pad 1.02)
  other vias: 7.62,30.48
S$538  (via drill 0.5 pad 1.02)
  other vias: 8.89,30.48
S$539  (via drill 0.5 pad 1.02)
  other vias: 10.16,30.48
S$540  (via drill 0.5 pad 1.02)
  other vias: 11.43,30.48
S$541  (via drill 0.5 pad 1.02)
  other vias: 12.7,30.48
S$542  (via drill 0.5 pad 1.02)
  other vias: 13.97,30.48
S$543  (via drill 0.5 pad 1.02)
  other vias: 15.24,30.48
S$544  (via drill 0.5 pad 1.02)
  other vias: 16.51,30.48
S$545  (via drill 0.5 pad 1.02)
  other vias: 17.78,30.48
S$546  (via drill 0.5 pad 1.02)
  other vias: 19.05,30.48
S$547  (via drill 0.5 pad 1.02)
  other vias: 20.32,30.48
S$548  (via drill 0.5 pad 1.02)
  other vias: 21.59,30.48
S$549  (via drill 0.5 pad 1.02)
  other vias: 22.86,30.48
S$550  (via drill 0.5 pad 1.02)
  other vias: 24.13,30.48
S$551  (via drill 0.5 pad 1.02)
  other vias: 25.4,30.48
S$552  (via drill 0.5 pad 1.02)
  other vias: 26.67,30.48
S$553  (via drill 0.5 pad 1.02)
  other vias: 27.94,30.48
S$554  (via drill 0.5 pad 1.02)
  other vias: 29.21,30.48
S$555  (via drill 0.5 pad 1.02)
  other vias: 30.48,30.48
S$556  (via drill 0.5 pad 1.02)
  other vias: 31.75,30.48
S$557  (via drill 0.5 pad 1.02)
  other vias: 33.02,30.48
S$558  (via drill 0.5 pad 1.02)
  other vias: 34.29,30.48
S$559  (via drill 0.5 pad 1.02)
  other vias: 35.56,30.48
S$560  (via drill 0.5 pad 1.02)
  other vias: 36.83,30.48
S$561  (via drill 0.5 pad 1.02)
  other vias: 38.1,30.48
S$562  (via drill 0.5 pad 1.02)
  other vias: 39.37,30.48
S$563  (via drill 0.5 pad 1.02)
  other vias: 40.64,30.48
S$564  (via drill 0.5 pad 1.02)
  other vias: 41.91,30.48
S$565  (via drill 0.5 pad 1.02)
  other vias: 43.18,30.48
S$566  (via drill 0.5 pad 1.02)
  other vias: 44.45,30.48
S$567  (via drill 0.5 pad 1.02)
  other vias: 45.72,30.48
S$570  (via drill 0.5 pad 1.02)
  other vias: 1.27,30.48
S$571  (via drill 0.5 pad 1.02)
  other vias: 2.54,29.21
S$572  (via drill 0.5 pad 1.02)
  other vias: 3.81,29.21
S$573  (via drill 0.5 pad 1.02)
  other vias: 5.08,29.21
S$574  (via drill 0.5 pad 1.02)
  other vias: 6.35,29.21
S$575  (via drill 0.5 pad 1.02)
  other vias: 7.62,29.21
S$576  (via drill 0.5 pad 1.02)
  other vias: 8.89,29.21
S$577  (via drill 0.5 pad 1.02)
  other vias: 10.16,29.21
S$578  (via drill 0.5 pad 1.02)
  other vias: 11.43,29.21
S$579  (via drill 0.5 pad 1.02)
  other vias: 12.7,29.21
S$580  (via drill 0.5 pad 1.02)
  other vias: 13.97,29.21
S$581  (via drill 0.5 pad 1.02)
  other vias: 15.24,29.21
S$582  (via drill 0.5 pad 1.02)
  other vias: 16.51,29.21
S$583  (via drill 0.5 pad 1.02)
  other vias: 17.78,29.21
S$584  (via drill 0.5 pad 1.02)
  other vias: 19.05,29.21
S$585  (via drill 0.5 pad 1.02)
  other vias: 20.32,29.21
S$586  (via drill 0.5 pad 1.02)
  other vias: 21.59,29.21
S$587  (via drill 0.5 pad 1.02)
  other vias: 22.86,29.21
S$588  (via drill 0.5 pad 1.02)
  other vias: 24.13,29.21
S$589  (via drill 0.5 pad 1.02)
  other vias: 25.4,29.21
S$590  (via drill 0.5 pad 1.02)
  other vias: 26.67,29.21
S$591  (via drill 0.5 pad 1.02)
  other vias: 27.94,29.21
S$592  (via drill 0.5 pad 1.02)
  other vias: 29.21,29.21
S$593  (via drill 0.5 pad 1.02)
  other vias: 30.48,29.21
S$594  (via drill 0.5 pad 1.02)
  other vias: 31.75,29.21
S$595  (via drill 0.5 pad 1.02)
  other vias: 33.02,29.21
S$596  (via drill 0.5 pad 1.02)
  other vias: 34.29,29.21
S$597  (via drill 0.5 pad 1.02)
  other vias: 35.56,29.21
S$598  (via drill 0.5 pad 1.02)
  other vias: 36.83,29.21
S$599  (via drill 0.5 pad 1.02)
  other vias: 38.1,29.21
S$600  (via drill 0.5 pad 1.02)
  other vias: 39.37,29.21
S$601  (via drill 0.5 pad 1.02)
  other vias: 40.64,29.21
S$602  (via drill 0.5 pad 1.02)
  other vias: 41.91,29.21
S$603  (via drill 0.5 pad 1.02)
  other vias: 43.18,29.21
S$604  (via drill 0.5 pad 1.02)
  other vias: 44.45,29.21
S$605  (via drill 0.5 pad 1.02)
  other vias: 45.72,29.21
S$608  (via drill 0.5 pad 1.02)
  other vias: 1.27,29.21
S$609  (via drill 0.5 pad 1.02)
  other vias: 2.54,33.02
S$610  (via drill 0.5 pad 1.02)
  other vias: 3.81,33.02
S$611  (via drill 0.5 pad 1.02)
  other vias: 5.08,33.02
S$612  (via drill 0.5 pad 1.02)
  other vias: 6.35,33.02
S$613  (via drill 0.5 pad 1.02)
  other vias: 7.62,33.02
S$614  (via drill 0.5 pad 1.02)
  other vias: 8.89,33.02
S$615  (via drill 0.5 pad 1.02)
  other vias: 10.16,33.02
S$616  (via drill 0.5 pad 1.02)
  other vias: 11.43,33.02
S$617  (via drill 0.5 pad 1.02)
  other vias: 12.7,33.02
S$618  (via drill 0.5 pad 1.02)
  other vias: 13.97,33.02
S$619  (via drill 0.5 pad 1.02)
  other vias: 15.24,33.02
S$620  (via drill 0.5 pad 1.02)
  other vias: 16.51,33.02
S$621  (via drill 0.5 pad 1.02)
  other vias: 17.78,33.02
S$622  (via drill 0.5 pad 1.02)
  other vias: 19.05,33.02
S$623  (via drill 0.5 pad 1.02)
  other vias: 20.32,33.02
S$624  (via drill 0.5 pad 1.02)
  other vias: 21.59,33.02
S$625  (via drill 0.5 pad 1.02)
  other vias: 22.86,33.02
S$626  (via drill 0.5 pad 1.02)
  other vias: 24.13,33.02
S$627  (via drill 0.5 pad 1.02)
  other vias: 25.4,33.02
S$628  (via drill 0.5 pad 1.02)
  other vias: 26.67,33.02
S$629  (via drill 0.5 pad 1.02)
  other vias: 27.94,33.02
S$630  (via drill 0.5 pad 1.02)
  other vias: 29.21,33.02
S$631  (via drill 0.5 pad 1.02)
  other vias: 30.48,33.02
S$632  (via drill 0.5 pad 1.02)
  other vias: 31.75,33.02
S$633  (via drill 0.5 pad 1.02)
  other vias: 33.02,33.02
S$634  (via drill 0.5 pad 1.02)
  other vias: 34.29,33.02
S$635  (via drill 0.5 pad 1.02)
  other vias: 35.56,33.02
S$636  (via drill 0.5 pad 1.02)
  other vias: 36.83,33.02
S$637  (via drill 0.5 pad 1.02)
  other vias: 38.1,33.02
S$638  (via drill 0.5 pad 1.02)
  other vias: 39.37,33.02
S$639  (via drill 0.5 pad 1.02)
  other vias: 40.64,33.02
S$640  (via drill 0.5 pad 1.02)
  other vias: 41.91,33.02
S$641  (via drill 0.5 pad 1.02)
  other vias: 43.18,33.02
S$642  (via drill 0.5 pad 1.02)
  other vias: 44.45,33.02
S$643  (via drill 0.5 pad 1.02)
  other vias: 45.72,33.02
S$646  (via drill 0.5 pad 1.02)
  other vias: 1.27,33.02
S$647  (via drill 0.5 pad 1.02)
  other vias: 2.54,31.75
S$648  (via drill 0.5 pad 1.02)
  other vias: 3.81,31.75
S$649  (via drill 0.5 pad 1.02)
  other vias: 5.08,31.75
S$650  (via drill 0.5 pad 1.02)
  other vias: 6.35,31.75
S$651  (via drill 0.5 pad 1.02)
  other vias: 7.62,31.75
S$652  (via drill 0.5 pad 1.02)
  other vias: 8.89,31.75
S$653  (via drill 0.5 pad 1.02)
  other vias: 10.16,31.75
S$654  (via drill 0.5 pad 1.02)
  other vias: 11.43,31.75
S$655  (via drill 0.5 pad 1.02)
  other vias: 12.7,31.75
S$656  (via drill 0.5 pad 1.02)
  other vias: 13.97,31.75
S$657  (via drill 0.5 pad 1.02)
  other vias: 15.24,31.75
S$658  (via drill 0.5 pad 1.02)
  other vias: 16.51,31.75
S$659  (via drill 0.5 pad 1.02)
  other vias: 17.78,31.75
S$660  (via drill 0.5 pad 1.02)
  other vias: 19.05,31.75
S$661  (via drill 0.5 pad 1.02)
  other vias: 20.32,31.75
S$662  (via drill 0.5 pad 1.02)
  other vias: 21.59,31.75
S$663  (via drill 0.5 pad 1.02)
  other vias: 22.86,31.75
S$664  (via drill 0.5 pad 1.02)
  other vias: 24.13,31.75
S$665  (via drill 0.5 pad 1.02)
  other vias: 25.4,31.75
S$666  (via drill 0.5 pad 1.02)
  other vias: 26.67,31.75
S$667  (via drill 0.5 pad 1.02)
  other vias: 27.94,31.75
S$668  (via drill 0.5 pad 1.02)
  other vias: 29.21,31.75
S$669  (via drill 0.5 pad 1.02)
  other vias: 30.48,31.75
S$670  (via drill 0.5 pad 1.02)
  other vias: 31.75,31.75
S$671  (via drill 0.5 pad 1.02)
  other vias: 33.02,31.75
S$672  (via drill 0.5 pad 1.02)
  other vias: 34.29,31.75
S$673  (via drill 0.5 pad 1.02)
  other vias: 35.56,31.75
S$674  (via drill 0.5 pad 1.02)
  other vias: 36.83,31.75
S$675  (via drill 0.5 pad 1.02)
  other vias: 38.1,31.75
S$676  (via drill 0.5 pad 1.02)
  other vias: 39.37,31.75
S$677  (via drill 0.5 pad 1.02)
  other vias: 40.64,31.75
S$678  (via drill 0.5 pad 1.02)
  other vias: 41.91,31.75
S$679  (via drill 0.5 pad 1.02)
  other vias: 43.18,31.75
S$680  (via drill 0.5 pad 1.02)
  other vias: 44.45,31.75
S$681  (via drill 0.5 pad 1.02)
  other vias: 45.72,31.75
S$684  (via drill 0.5 pad 1.02)
  other vias: 1.27,31.75
S$685  (via drill 0.5 pad 1.02)
  other vias: 2.54,35.56
S$686  (via drill 0.5 pad 1.02)
  other vias: 3.81,35.56
S$687  (via drill 0.5 pad 1.02)
  other vias: 5.08,35.56
S$688  (via drill 0.5 pad 1.02)
  other vias: 6.35,35.56
S$689  (via drill 0.5 pad 1.02)
  other vias: 7.62,35.56
S$690  (via drill 0.5 pad 1.02)
  other vias: 8.89,35.56
S$691  (via drill 0.5 pad 1.02)
  other vias: 10.16,35.56
S$692  (via drill 0.5 pad 1.02)
  other vias: 11.43,35.56
S$693  (via drill 0.5 pad 1.02)
  other vias: 12.7,35.56
S$694  (via drill 0.5 pad 1.02)
  other vias: 13.97,35.56
S$695  (via drill 0.5 pad 1.02)
  other vias: 15.24,35.56
S$696  (via drill 0.5 pad 1.02)
  other vias: 16.51,35.56
S$697  (via drill 0.5 pad 1.02)
  other vias: 17.78,35.56
S$698  (via drill 0.5 pad 1.02)
  other vias: 19.05,35.56
S$699  (via drill 0.5 pad 1.02)
  other vias: 20.32,35.56
S$700  (via drill 0.5 pad 1.02)
  other vias: 21.59,35.56
S$701  (via drill 0.5 pad 1.02)
  other vias: 22.86,35.56
S$702  (via drill 0.5 pad 1.02)
  other vias: 24.13,35.56
S$703  (via drill 0.5 pad 1.02)
  other vias: 25.4,35.56
S$704  (via drill 0.5 pad 1.02)
  other vias: 26.67,35.56
S$705  (via drill 0.5 pad 1.02)
  other vias: 27.94,35.56
S$706  (via drill 0.5 pad 1.02)
  other vias: 29.21,35.56
S$707  (via drill 0.5 pad 1.02)
  other vias: 30.48,35.56
S$708  (via drill 0.5 pad 1.02)
  other vias: 31.75,35.56
S$709  (via drill 0.5 pad 1.02)
  other vias: 33.02,35.56
S$710  (via drill 0.5 pad 1.02)
  other vias: 34.29,35.56
S$711  (via drill 0.5 pad 1.02)
  other vias: 35.56,35.56
S$712  (via drill 0.5 pad 1.02)
  other vias: 36.83,35.56
S$713  (via drill 0.5 pad 1.02)
  other vias: 38.1,35.56
S$714  (via drill 0.5 pad 1.02)
  other vias: 39.37,35.56
S$715  (via drill 0.5 pad 1.02)
  other vias: 40.64,35.56
S$716  (via drill 0.5 pad 1.02)
  other vias: 41.91,35.56
S$717  (via drill 0.5 pad 1.02)
  other vias: 43.18,35.56
S$718  (via drill 0.5 pad 1.02)
  other vias: 44.45,35.56
S$719  (via drill 0.5 pad 1.02)
  other vias: 45.72,35.56
S$720  (via drill 0.5 pad 1.02)
  other vias: 46.99,35.56
S$721  (via drill 0.5 pad 1.02)
  other vias: 48.26,35.56
S$722  (via drill 0.5 pad 1.02)
  other vias: 1.27,35.56
S$723  (via drill 0.5 pad 1.02)
  other vias: 2.54,34.29
S$724  (via drill 0.5 pad 1.02)
  other vias: 3.81,34.29
S$725  (via drill 0.5 pad 1.02)
  other vias: 5.08,34.29
S$726  (via drill 0.5 pad 1.02)
  other vias: 6.35,34.29
S$727  (via drill 0.5 pad 1.02)
  other vias: 7.62,34.29
S$728  (via drill 0.5 pad 1.02)
  other vias: 8.89,34.29
S$729  (via drill 0.5 pad 1.02)
  other vias: 10.16,34.29
S$730  (via drill 0.5 pad 1.02)
  other vias: 11.43,34.29
S$731  (via drill 0.5 pad 1.02)
  other vias: 12.7,34.29
S$732  (via drill 0.5 pad 1.02)
  other vias: 13.97,34.29
S$733  (via drill 0.5 pad 1.02)
  other vias: 15.24,34.29
S$734  (via drill 0.5 pad 1.02)
  other vias: 16.51,34.29
S$735  (via drill 0.5 pad 1.02)
  other vias: 17.78,34.29
S$736  (via drill 0.5 pad 1.02)
  other vias: 19.05,34.29
S$737  (via drill 0.5 pad 1.02)
  other vias: 20.32,34.29
S$738  (via drill 0.5 pad 1.02)
  other vias: 21.59,34.29
S$739  (via drill 0.5 pad 1.02)
  other vias: 22.86,34.29
S$740  (via drill 0.5 pad 1.02)
  other vias: 24.13,34.29
S$741  (via drill 0.5 pad 1.02)
  other vias: 25.4,34.29
S$742  (via drill 0.5 pad 1.02)
  other vias: 26.67,34.29
S$743  (via drill 0.5 pad 1.02)
  other vias: 27.94,34.29
S$744  (via drill 0.5 pad 1.02)
  other vias: 29.21,34.29
S$745  (via drill 0.5 pad 1.02)
  other vias: 30.48,34.29
S$746  (via drill 0.5 pad 1.02)
  other vias: 31.75,34.29
S$747  (via drill 0.5 pad 1.02)
  other vias: 33.02,34.29
S$748  (via drill 0.5 pad 1.02)
  other vias: 34.29,34.29
S$749  (via drill 0.5 pad 1.02)
  other vias: 35.56,34.29
S$750  (via drill 0.5 pad 1.02)
  other vias: 36.83,34.29
S$751  (via drill 0.5 pad 1.02)
  other vias: 38.1,34.29
S$752  (via drill 0.5 pad 1.02)
  other vias: 39.37,34.29
S$753  (via drill 0.5 pad 1.02)
  other vias: 40.64,34.29
S$754  (via drill 0.5 pad 1.02)
  other vias: 41.91,34.29
S$755  (via drill 0.5 pad 1.02)
  other vias: 43.18,34.29
S$756  (via drill 0.5 pad 1.02)
  other vias: 44.45,34.29
S$757  (via drill 0.5 pad 1.02)
  other vias: 45.72,34.29
S$760  (via drill 0.5 pad 1.02)
  other vias: 1.27,34.29
S$761  (via drill 0.5 pad 1.02)
  other vias: 2.54,38.1
S$762  (via drill 0.5 pad 1.02)
  other vias: 3.81,38.1
S$763  (via drill 0.5 pad 1.02)
  other vias: 5.08,38.1
S$764  (via drill 0.5 pad 1.02)
  other vias: 6.35,38.1
S$765  (via drill 0.5 pad 1.02)
  other vias: 7.62,38.1
S$766  (via drill 0.5 pad 1.02)
  other vias: 8.89,38.1
S$767  (via drill 0.5 pad 1.02)
  other vias: 10.16,38.1
S$768  (via drill 0.5 pad 1.02)
  other vias: 11.43,38.1
S$769  (via drill 0.5 pad 1.02)
  other vias: 12.7,38.1
S$770  (via drill 0.5 pad 1.02)
  other vias: 13.97,38.1
S$771  (via drill 0.5 pad 1.02)
  other vias: 15.24,38.1
S$772  (via drill 0.5 pad 1.02)
  other vias: 16.51,38.1
S$773  (via drill 0.5 pad 1.02)
  other vias: 17.78,38.1
S$774  (via drill 0.5 pad 1.02)
  other vias: 19.05,38.1
S$775  (via drill 0.5 pad 1.02)
  other vias: 20.32,38.1
S$776  (via drill 0.5 pad 1.02)
  other vias: 21.59,38.1
S$777  (via drill 0.5 pad 1.02)
  other vias: 22.86,38.1
S$778  (via drill 0.5 pad 1.02)
  other vias: 24.13,38.1
S$779  (via drill 0.5 pad 1.02)
  other vias: 25.4,38.1
S$780  (via drill 0.5 pad 1.02)
  other vias: 26.67,38.1
S$781  (via drill 0.5 pad 1.02)
  other vias: 27.94,38.1
S$782  (via drill 0.5 pad 1.02)
  other vias: 29.21,38.1
S$783  (via drill 0.5 pad 1.02)
  other vias: 30.48,38.1
S$784  (via drill 0.5 pad 1.02)
  other vias: 31.75,38.1
S$785  (via drill 0.5 pad 1.02)
  other vias: 33.02,38.1
S$786  (via drill 0.5 pad 1.02)
  other vias: 34.29,38.1
S$787  (via drill 0.5 pad 1.02)
  other vias: 35.56,38.1
S$788  (via drill 0.5 pad 1.02)
  other vias: 36.83,38.1
S$789  (via drill 0.5 pad 1.02)
  other vias: 38.1,38.1
S$790  (via drill 0.5 pad 1.02)
  other vias: 39.37,38.1
S$791  (via drill 0.5 pad 1.02)
  other vias: 40.64,38.1
S$792  (via drill 0.5 pad 1.02)
  other vias: 41.91,38.1
S$793  (via drill 0.5 pad 1.02)
  other vias: 43.18,38.1
S$794  (via drill 0.5 pad 1.02)
  other vias: 44.45,38.1
S$795  (via drill 0.5 pad 1.02)
  other vias: 45.72,38.1
S$796  (via drill 0.5 pad 1.02)
  other vias: 46.99,38.1
S$797  (via drill 0.5 pad 1.02)
  other vias: 48.26,38.1
S$798  (via drill 0.5 pad 1.02)
  other vias: 1.27,38.1
S$799  (via drill 0.5 pad 1.02)
  other vias: 2.54,36.83
S$800  (via drill 0.5 pad 1.02)
  other vias: 3.81,36.83
S$801  (via drill 0.5 pad 1.02)
  other vias: 5.08,36.83
S$802  (via drill 0.5 pad 1.02)
  other vias: 6.35,36.83
S$803  (via drill 0.5 pad 1.02)
  other vias: 7.62,36.83
S$804  (via drill 0.5 pad 1.02)
  other vias: 8.89,36.83
S$805  (via drill 0.5 pad 1.02)
  other vias: 10.16,36.83
S$806  (via drill 0.5 pad 1.02)
  other vias: 11.43,36.83
S$807  (via drill 0.5 pad 1.02)
  other vias: 12.7,36.83
S$808  (via drill 0.5 pad 1.02)
  other vias: 13.97,36.83
S$809  (via drill 0.5 pad 1.02)
  other vias: 15.24,36.83
S$810  (via drill 0.5 pad 1.02)
  other vias: 16.51,36.83
S$811  (via drill 0.5 pad 1.02)
  other vias: 17.78,36.83
S$812  (via drill 0.5 pad 1.02)
  other vias: 19.05,36.83
S$813  (via drill 0.5 pad 1.02)
  other vias: 20.32,36.83
S$814  (via drill 0.5 pad 1.02)
  other vias: 21.59,36.83
S$815  (via drill 0.5 pad 1.02)
  other vias: 22.86,36.83
S$816  (via drill 0.5 pad 1.02)
  other vias: 24.13,36.83
S$817  (via drill 0.5 pad 1.02)
  other vias: 25.4,36.83
S$818  (via drill 0.5 pad 1.02)
  other vias: 26.67,36.83
S$819  (via drill 0.5 pad 1.02)
  other vias: 27.94,36.83
S$820  (via drill 0.5 pad 1.02)
  other vias: 29.21,36.83
S$821  (via drill 0.5 pad 1.02)
  other vias: 30.48,36.83
S$822  (via drill 0.5 pad 1.02)
  other vias: 31.75,36.83
S$823  (via drill 0.5 pad 1.02)
  other vias: 33.02,36.83
S$824  (via drill 0.5 pad 1.02)
  other vias: 34.29,36.83
S$825  (via drill 0.5 pad 1.02)
  other vias: 35.56,36.83
S$826  (via drill 0.5 pad 1.02)
  other vias: 36.83,36.83
S$827  (via drill 0.5 pad 1.02)
  other vias: 38.1,36.83
S$828  (via drill 0.5 pad 1.02)
  other vias: 39.37,36.83
S$829  (via drill 0.5 pad 1.02)
  other vias: 40.64,36.83
S$830  (via drill 0.5 pad 1.02)
  other vias: 41.91,36.83
S$831  (via drill 0.5 pad 1.02)
  other vias: 43.18,36.83
S$832  (via drill 0.5 pad 1.02)
  other vias: 44.45,36.83
S$833  (via drill 0.5 pad 1.02)
  other vias: 45.72,36.83
S$834  (via drill 0.5 pad 1.02)
  other vias: 46.99,36.83
S$835  (via drill 0.5 pad 1.02)
  other vias: 48.26,36.83
S$836  (via drill 0.5 pad 1.02)
  other vias: 1.27,36.83
S$837  (via drill 0.5 pad 1.02)
  other vias: 2.54,40.64
S$838  (via drill 0.5 pad 1.02)
  other vias: 3.81,40.64
S$839  (via drill 0.5 pad 1.02)
  other vias: 5.08,40.64
S$840  (via drill 0.5 pad 1.02)
  other vias: 6.35,40.64
S$841  (via drill 0.5 pad 1.02)
  other vias: 7.62,40.64
S$842  (via drill 0.5 pad 1.02)
  other vias: 8.89,40.64
S$843  (via drill 0.5 pad 1.02)
  other vias: 10.16,40.64
S$844  (via drill 0.5 pad 1.02)
  other vias: 11.43,40.64
S$845  (via drill 0.5 pad 1.02)
  other vias: 12.7,40.64
S$846  (via drill 0.5 pad 1.02)
  other vias: 13.97,40.64
S$847  (via drill 0.5 pad 1.02)
  other vias: 15.24,40.64
S$848  (via drill 0.5 pad 1.02)
  other vias: 16.51,40.64
S$849  (via drill 0.5 pad 1.02)
  other vias: 17.78,40.64
S$850  (via drill 0.5 pad 1.02)
  other vias: 19.05,40.64
S$851  (via drill 0.5 pad 1.02)
  other vias: 20.32,40.64
S$852  (via drill 0.5 pad 1.02)
  other vias: 21.59,40.64
S$853  (via drill 0.5 pad 1.02)
  other vias: 22.86,40.64
S$854  (via drill 0.5 pad 1.02)
  other vias: 24.13,40.64
S$855  (via drill 0.5 pad 1.02)
  other vias: 25.4,40.64
S$856  (via drill 0.5 pad 1.02)
  other vias: 26.67,40.64
S$857  (via drill 0.5 pad 1.02)
  other vias: 27.94,40.64
S$858  (via drill 0.5 pad 1.02)
  other vias: 29.21,40.64
S$859  (via drill 0.5 pad 1.02)
  other vias: 30.48,40.64
S$860  (via drill 0.5 pad 1.02)
  other vias: 31.75,40.64
S$861  (via drill 0.5 pad 1.02)
  other vias: 33.02,40.64
S$862  (via drill 0.5 pad 1.02)
  other vias: 34.29,40.64
S$863  (via drill 0.5 pad 1.02)
  other vias: 35.56,40.64
S$864  (via drill 0.5 pad 1.02)
  other vias: 36.83,40.64
S$865  (via drill 0.5 pad 1.02)
  other vias: 38.1,40.64
S$866  (via drill 0.5 pad 1.02)
  other vias: 39.37,40.64
S$867  (via drill 0.5 pad 1.02)
  other vias: 40.64,40.64
S$868  (via drill 0.5 pad 1.02)
  other vias: 41.91,40.64
S$869  (via drill 0.5 pad 1.02)
  other vias: 43.18,40.64
S$870  (via drill 0.5 pad 1.02)
  other vias: 44.45,40.64
S$871  (via drill 0.5 pad 1.02)
  other vias: 45.72,40.64
S$872  (via drill 0.5 pad 1.02)
  other vias: 46.99,40.64
S$873  (via drill 0.5 pad 1.02)
  other vias: 48.26,40.64
S$874  (via drill 0.5 pad 1.02)
  other vias: 1.27,40.64
S$875  (via drill 0.5 pad 1.02)
  other vias: 2.54,39.37
S$876  (via drill 0.5 pad 1.02)
  other vias: 3.81,39.37
S$877  (via drill 0.5 pad 1.02)
  other vias: 5.08,39.37
S$878  (via drill 0.5 pad 1.02)
  other vias: 6.35,39.37
S$879  (via drill 0.5 pad 1.02)
  other vias: 7.62,39.37
S$880  (via drill 0.5 pad 1.02)
  other vias: 8.89,39.37
S$881  (via drill 0.5 pad 1.02)
  other vias: 10.16,39.37
S$882  (via drill 0.5 pad 1.02)
  other vias: 11.43,39.37
S$883  (via drill 0.5 pad 1.02)
  other vias: 12.7,39.37
S$884  (via drill 0.5 pad 1.02)
  other vias: 13.97,39.37
S$885  (via drill 0.5 pad 1.02)
  other vias: 15.24,39.37
S$886  (via drill 0.5 pad 1.02)
  other vias: 16.51,39.37
S$887  (via drill 0.5 pad 1.02)
  other vias: 17.78,39.37
S$888  (via drill 0.5 pad 1.02)
  other vias: 19.05,39.37
S$889  (via drill 0.5 pad 1.02)
  other vias: 20.32,39.37
S$890  (via drill 0.5 pad 1.02)
  other vias: 21.59,39.37
S$891  (via drill 0.5 pad 1.02)
  other vias: 22.86,39.37
S$892  (via drill 0.5 pad 1.02)
  other vias: 24.13,39.37
S$893  (via drill 0.5 pad 1.02)
  other vias: 25.4,39.37
S$894  (via drill 0.5 pad 1.02)
  other vias: 26.67,39.37
S$895  (via drill 0.5 pad 1.02)
  other vias: 27.94,39.37
S$896  (via drill 0.5 pad 1.02)
  other vias: 29.21,39.37
S$897  (via drill 0.5 pad 1.02)
  other vias: 30.48,39.37
S$898  (via drill 0.5 pad 1.02)
  other vias: 31.75,39.37
S$899  (via drill 0.5 pad 1.02)
  other vias: 33.02,39.37
S$900  (via drill 0.5 pad 1.02)
  other vias: 34.29,39.37
S$901  (via drill 0.5 pad 1.02)
  other vias: 35.56,39.37
S$902  (via drill 0.5 pad 1.02)
  other vias: 36.83,39.37
S$903  (via drill 0.5 pad 1.02)
  other vias: 38.1,39.37
S$904  (via drill 0.5 pad 1.02)
  other vias: 39.37,39.37
S$905  (via drill 0.5 pad 1.02)
  other vias: 40.64,39.37
S$906  (via drill 0.5 pad 1.02)
  other vias: 41.91,39.37
S$907  (via drill 0.5 pad 1.02)
  other vias: 43.18,39.37
S$908  (via drill 0.5 pad 1.02)
  other vias: 44.45,39.37
S$909  (via drill 0.5 pad 1.02)
  other vias: 45.72,39.37
S$910  (via drill 0.5 pad 1.02)
  other vias: 46.99,39.37
S$911  (via drill 0.5 pad 1.02)
  other vias: 48.26,39.37
S$912  (via drill 0.5 pad 1.02)
  other vias: 1.27,39.37
S$913  (via drill 0.5 pad 1.02)
  other vias: 2.54,43.18
S$914  (via drill 0.5 pad 1.02)